# EAGLE board rocketnet-daughter-16-RA-down (EAGLE 6.5.0)
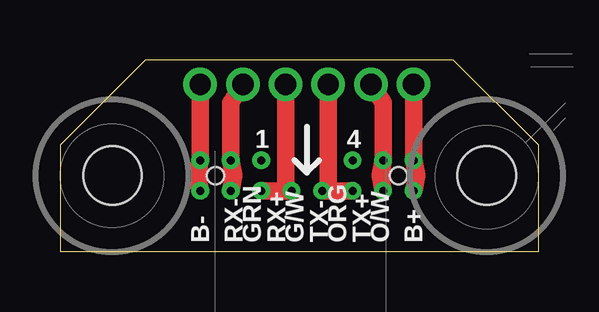
[diagram p0: board, top side]
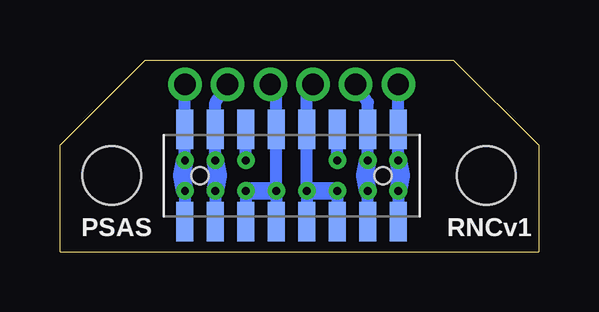
[diagram p1: board, bottom side, seen from below]

Size 19.94 x 8 mm. Coordinates in mm from the lower left corner, seen from the top.
Outline: 19.94,0 19.94,4.45 16.38,8 3.56,8 0,4.45 0,0 19.94,0
Copper layers (1*16): Top 0.035mm / dielectric 1.5mm / Bottom 0.035mm
Design rules "lpkf-s63-epl *": minimum track width 10mil, minimum drill 0.35mm, track to track 8mil, track to pad 8mil, pad to pad 8mil, via to via 8mil, smd to smd 8mil, copper to edge 10mil, drill to drill 8mil, minimum pad ring 10mil, minimum via ring 8mil, stop-mask expansion 4mil, vias tented up to drill 20mil, thermal gap 10mil
Holes 2.44 mm at 17.79,3.17 2.19,3.17

## Footprints (pad centres in the part's own frame; a part is rotated, then mirrored left to right if it is on the bottom)
HARWIN-M50-31508-NO-HOLES = smd 0.71 x 1.65: 1 -4.445,-1.925; 2 -4.445,1.925; 3 -3.175,-1.925; 4 -3.175,1.925; 5 -1.905,-1.925; 6 -1.905,1.925; 7 -0.635,-1.925; 8 -0.635,1.925; 9 0.635,-1.925; 10 0.635,1.925; 11 1.905,-1.925; 12 1.905,1.925; 13 3.175,-1.925; 14 3.175,1.925; 15 4.445,-1.925; 16 4.445,1.925 | hole 0.71: 3.81,0; -3.81,0

## Placement (x,y rotation side)
E$2  [HARWIN-M50-31508-NO-HOLES]  10.29,3.17 0 bottom

## Library data of the parts
E$2 = rocketnet-connector

## Tracks (layer width: path | path; a pad name or v marks a point on that pad's centre or on a via)
B+  (via drill 0.33, 0.89 pad 1.4)
  Top 0.737: v5.84,6.98 v5.84,3.81 5.72,3.17 v5.84,2.54
  Bottom 0.508: v5.84,3.81 v5.84,6.98 | v5.84,2.54 5.84,1.02
  Bottom 0.737: v5.84,3.81 5.72,3.17 v5.84,2.54
B-  (via drill 0.33, 0.89 pad 1.4)
  Top 0.737: v14.73,2.54 14.86,3.17 v14.73,3.81 v14.73,6.98
  Bottom 0.508: v14.73,6.98 v14.73,2.54 14.73,1.14 | v14.73,3.81 14.73,5.21
  Bottom 0.737: v14.73,3.81 14.86,3.17 v14.73,2.54
RX+  (via drill 0.33, 0.89 pad 1.4)
  Top 0.737: v12.19,2.54 11.18,2.54 | 11.18,2.54 v10.92,2.54 | v11.18,6.98 11.18,2.54
  Bottom 0.508: v11.18,6.98 10.92,6.6 v10.92,2.54 10.92,1.02 | v12.19,2.54 12.19,1.02
  Bottom 0.737: v10.92,2.54 v12.19,2.54
RX-  (via drill 0.33, 0.89 pad 1.4)
  Top 0.737: v13.46,2.54 13.34,3.17 v13.46,3.81 13.46,6.22 v12.95,6.98
  Bottom 0.508: v13.46,3.81 v13.46,2.54 13.46,1.14 | v13.46,3.81 13.46,6.22 v12.95,6.98 | v13.46,3.81 13.46,5.21
  Bottom 0.737: v13.46,3.81 13.34,3.17 v13.46,2.54
S$1  (via drill 0.33)
  Bottom 0.508: v8.38,3.81 8.38,5.21
S$2  (via drill 0.33)
  Bottom 0.508: v12.19,3.81 12.19,5.33
TX+  (via drill 0.33, 0.89 pad 1.4)
  Top 0.737: v7.11,2.54 7.24,3.17 v7.11,3.81 7.11,6.22 v7.62,6.98
  Bottom 0.508: 7.11,1.14 7.11,6.22 v7.62,6.98
  Bottom 0.737: v7.11,3.81 7.24,3.17 v7.11,2.54
TX-  (via drill 0.33, 0.89 pad 1.4)
  Top 0.737: v8.38,2.54 9.4,2.54 | 9.4,2.54 v9.65,2.54 | v9.4,6.98 9.4,2.54
  Bottom 0.508: v9.4,6.98 9.65,6.6 v9.65,2.54 9.65,1.02 | v8.38,2.54 8.38,1.14
  Bottom 0.737: v8.38,2.54 v9.65,2.54

## Text on the board
tPlace: 1 | 4 | B- | RX- | GRN | RX+ | G/W | TX- | ORG | TX+ | O/W | B+
bPlace: RNCv1 | PSAS
tDocu: TOP VIEW (M50 on bottom of board) | Edge of top plate | Edge of RNH PCB | Nut OD | Tool OD | Wire bundle info | Brown (PWR) wire: 0.055" OD / CAT6 wire: 0.040" OD | Entire "ribbon": 0.275 in